# EAGLE board Qwiic AHT20 Breakout-Panel (EAGLE 9.6.2), part 1 of 3
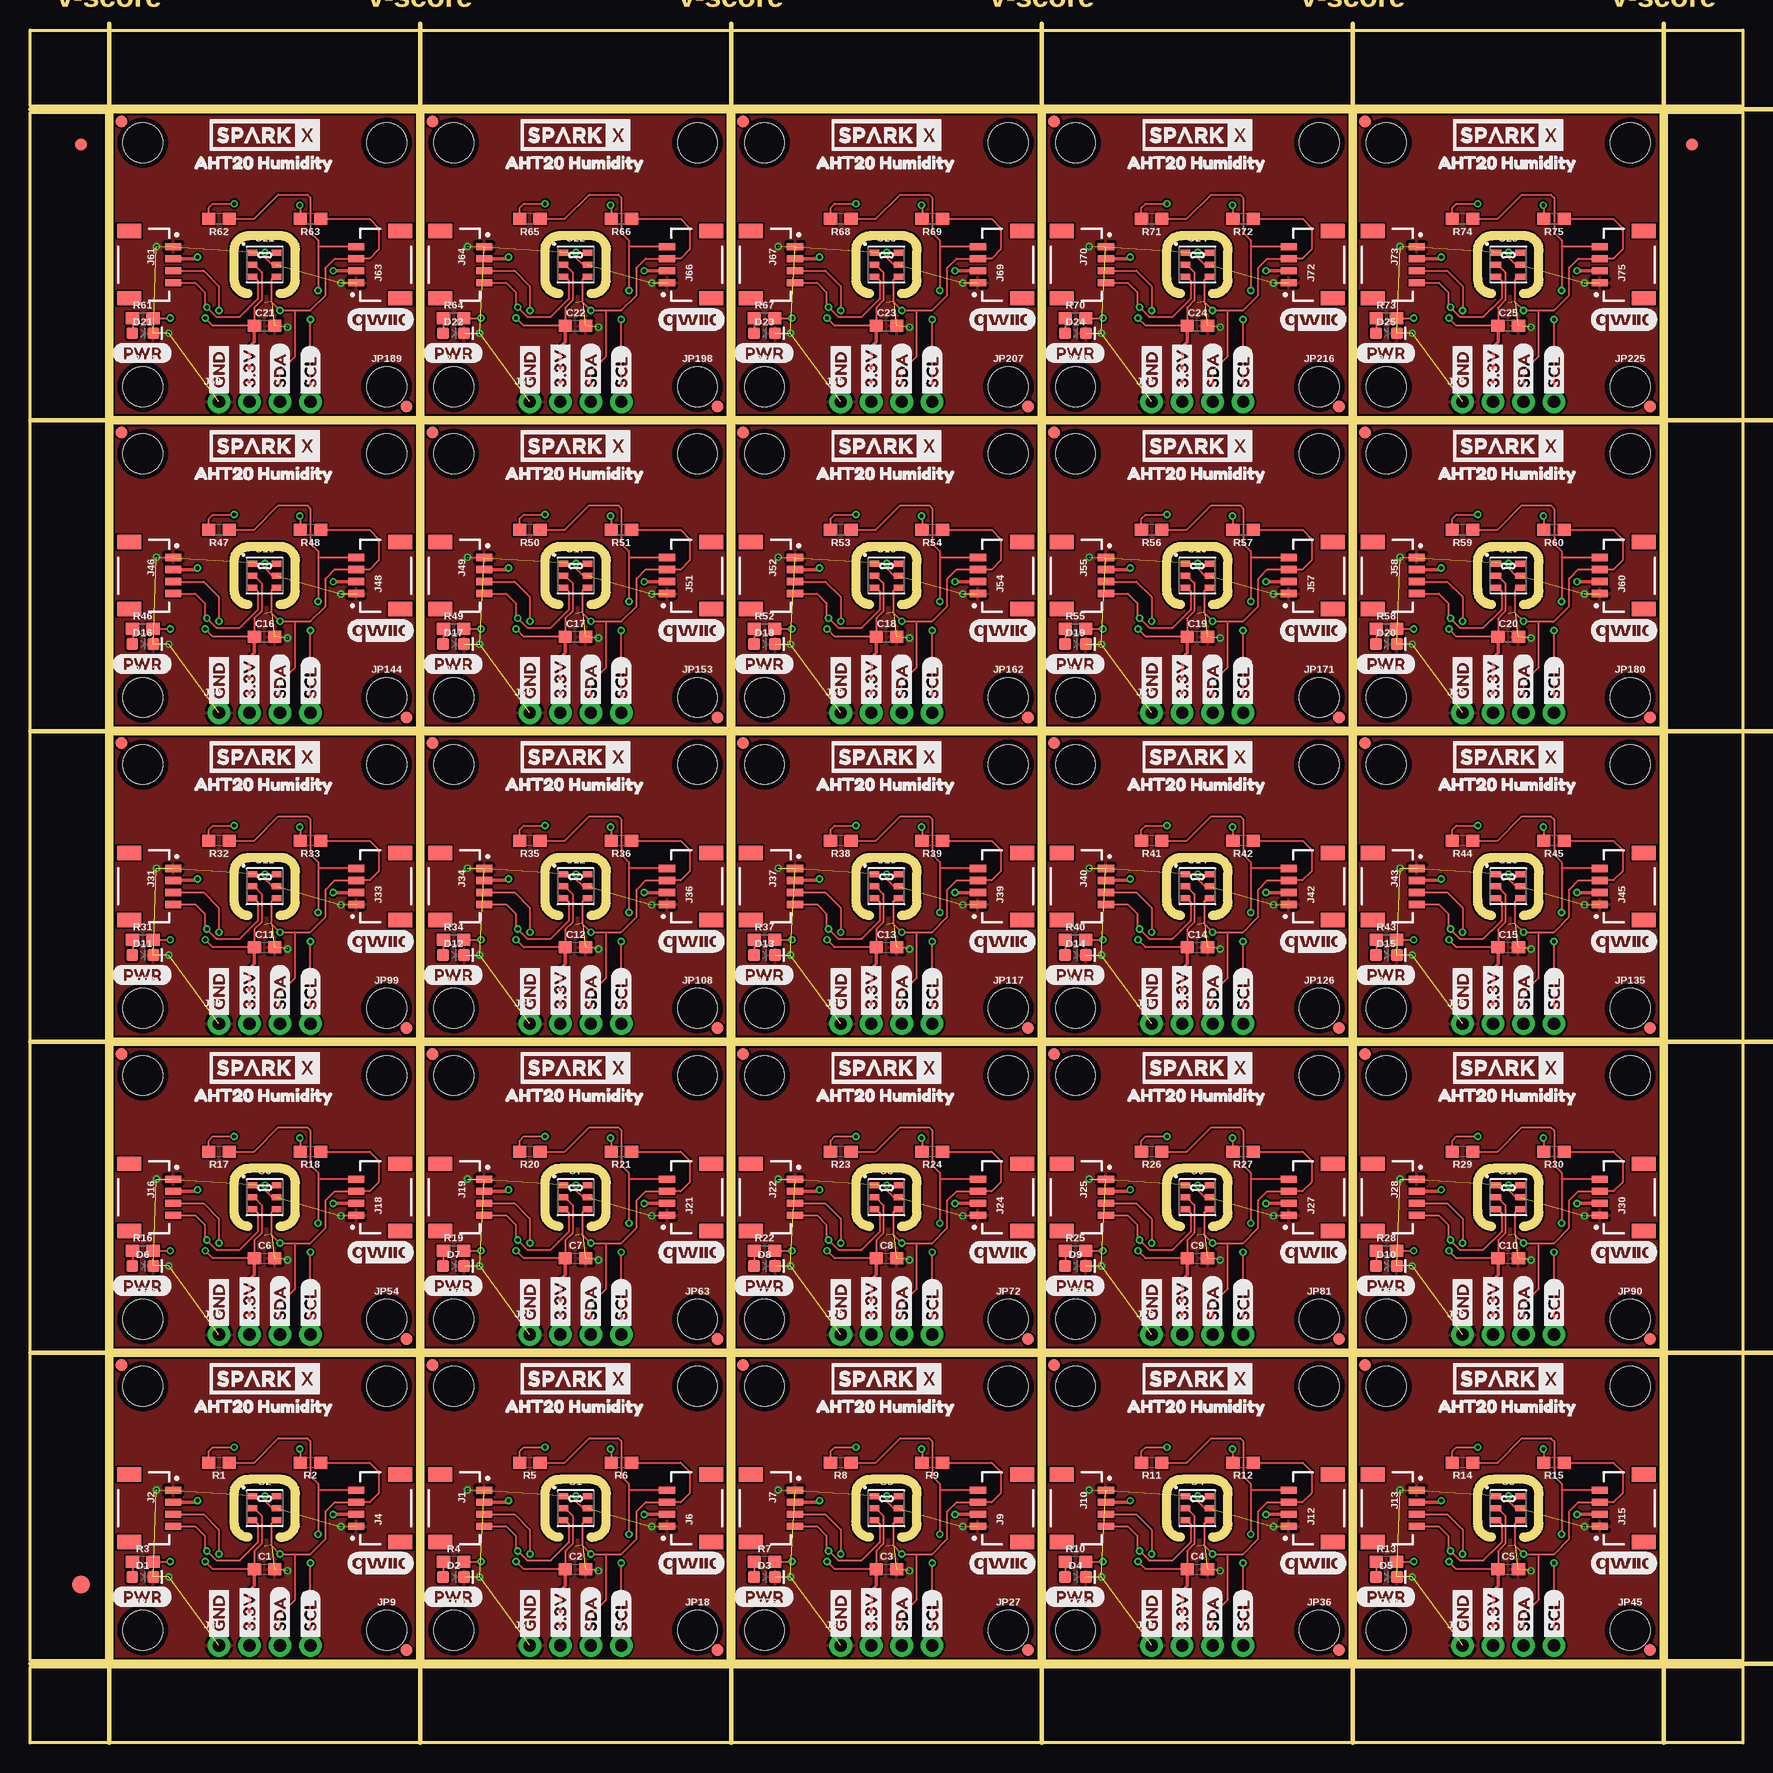
[diagram p0: board, top side]
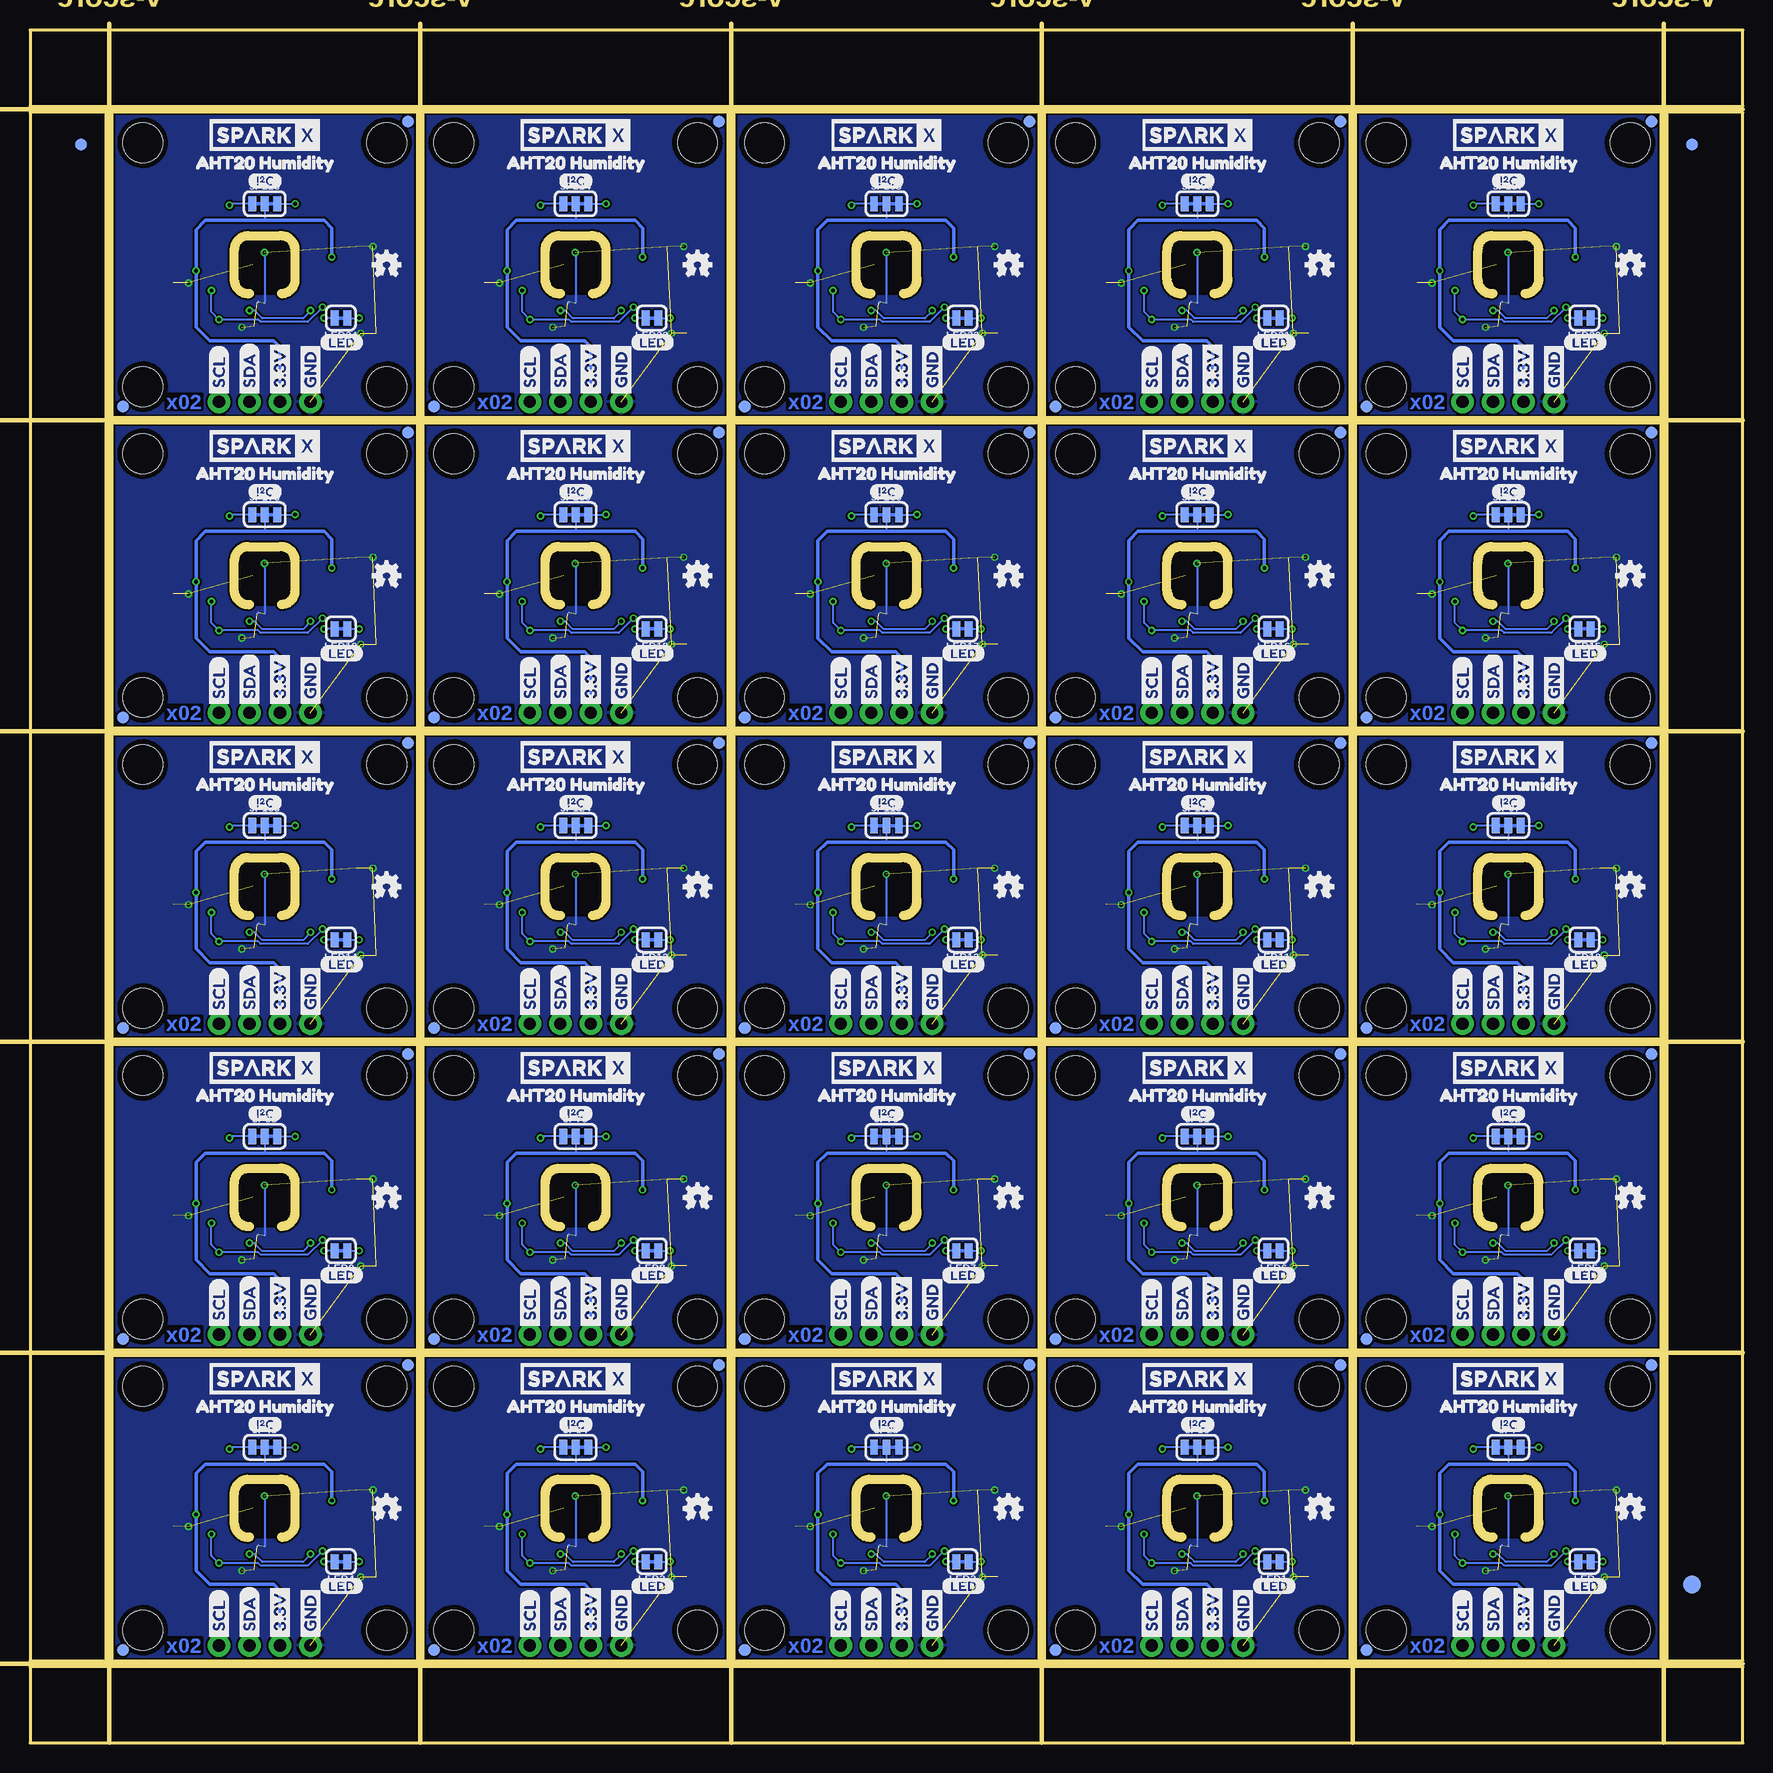
[diagram p1: board, bottom side, seen from below]

Size 142.75 x 142.75 mm. Coordinates in mm from the lower left corner, seen from the top.
Outline: 291 segments
Copper layers (1*16): Top 0.035mm / dielectric 1.5mm / Bottom 0.035mm
Design rules "Qwiic AHT20 Breakout": minimum track width 6mil, minimum drill 0.3mm, track to track 6mil, track to pad 6mil, pad to pad 6mil, via to via 6mil, smd to smd 6mil, copper to edge 6mil, drill to drill 6mil, minimum pad ring 6mil, minimum via ring 6mil, stop-mask expansion 4mil, vias tented up to drill 25mil, thermal gap 10mil
Milling: 12 lines

## Footprints (pad centres in the part's own frame; a part is rotated, then mirrored left to right if it is on the bottom)
0603 = smd 1.1 x 1: 1 -0.85,0; 2 0.85,0
LED-0603 = smd 1 x 1: A -0.877,0; C 0.877,0
FIDUCIAL-1X2 = smd 1 x 1: 1 0,0
FIDUCIAL-1.5X3 = smd 1.5 x 1.5: 1 0,0
JST04_1MM_RA = smd 0.6 x 1.35: 1 -1.5,0; 2 -0.5,0; 3 0.5,0; 4 1.5,0 | smd 1.2 x 2: NC1 2.8,-3.675; NC2 -2.8,-3.675
1X04_NO_SILK = drill 1.016 pad 1.88: 1 0,0; 2 2.54,0; 3 5.08,0; 4 7.62,0
STAND-OFF = hole 3.302: 0,0
SMT-JUMPER_3_2-NC_TRACE_SILK = smd 0.66 x 1.27: 1 -1.041,0; 2 0,0; 3 1.041,0
SMT-JUMPER_2_NC_TRACE_SILK = smd 0.66 x 1.27: 1 -0.521,0; 2 0.521,0
QFN-6 = smd 0.8 x 0.5: ADR -1,1; GND 1,0; NC2 1,1; SCL -1,-1; SDA 1,-1; VDD -1,0

## Placement (x,y rotation side)
C1  0.1uF  [0603]  19.56,14.48 0 top
C2  0.1uF  [0603]  45.47,14.48 0 top
C3  0.1uF  [0603]  71.37,14.48 0 top
C4  0.1uF  [0603]  97.28,14.48 0 top
C5  0.1uF  [0603]  123.19,14.48 0 top
C6  0.1uF  [0603]  19.56,40.39 0 top
C7  0.1uF  [0603]  45.47,40.39 0 top
C8  0.1uF  [0603]  71.37,40.39 0 top
C9  0.1uF  [0603]  97.28,40.39 0 top
C10  0.1uF  [0603]  123.19,40.39 0 top
C11  0.1uF  [0603]  19.56,66.29 0 top
C12  0.1uF  [0603]  45.47,66.29 0 top
C13  0.1uF  [0603]  71.37,66.29 0 top
C14  0.1uF  [0603]  97.28,66.29 0 top
C15  0.1uF  [0603]  123.19,66.29 0 top
C16  0.1uF  [0603]  19.56,92.2 0 top
C17  0.1uF  [0603]  45.47,92.2 0 top
C18  0.1uF  [0603]  71.37,92.2 0 top
C19  0.1uF  [0603]  97.28,92.2 0 top
C20  0.1uF  [0603]  123.19,92.2 0 top
C21  0.1uF  [0603]  19.56,118.11 0 top
C22  0.1uF  [0603]  45.47,118.11 0 top
C23  0.1uF  [0603]  71.37,118.11 0 top
C24  0.1uF  [0603]  97.28,118.11 0 top
C25  0.1uF  [0603]  123.19,118.11 0 top
D1  RED  [LED-0603]  9.4,13.84 0 top
D2  RED  [LED-0603]  35.31,13.84 0 top
D3  RED  [LED-0603]  61.21,13.84 0 top
D4  RED  [LED-0603]  87.12,13.84 0 top
D5  RED  [LED-0603]  113.03,13.84 0 top
D6  RED  [LED-0603]  9.4,39.75 0 top
D7  RED  [LED-0603]  35.31,39.75 0 top
D8  RED  [LED-0603]  61.21,39.75 0 top
D9  RED  [LED-0603]  87.12,39.75 0 top
D10  RED  [LED-0603]  113.03,39.75 0 top
D11  RED  [LED-0603]  9.4,65.66 0 top
D12  RED  [LED-0603]  35.31,65.66 0 top
D13  RED  [LED-0603]  61.21,65.66 0 top
D14  RED  [LED-0603]  87.12,65.66 0 top
D15  RED  [LED-0603]  113.03,65.66 0 top
D16  RED  [LED-0603]  9.4,91.57 0 top
D17  RED  [LED-0603]  35.31,91.57 0 top
D18  RED  [LED-0603]  61.21,91.57 0 top
D19  RED  [LED-0603]  87.12,91.57 0 top
D20  RED  [LED-0603]  113.03,91.57 0 top
D21  RED  [LED-0603]  9.4,117.48 0 top
D22  RED  [LED-0603]  35.31,117.48 0 top
D23  RED  [LED-0603]  61.21,117.48 0 top
D24  RED  [LED-0603]  87.12,117.48 0 top
D25  RED  [LED-0603]  113.03,117.48 0 top
E$1  [FIDUCIAL-1X2]  4.23,133.22 0 top
E$2  [FIDUCIAL-1X2]  4.23,133.22 0 bottom
E$3  [FIDUCIAL-1X2]  138.51,133.22 0 top
E$4  [FIDUCIAL-1X2]  138.51,133.22 0 bottom
E$5  [FIDUCIAL-1.5X3]  4.23,13.21 0 top
E$6  [FIDUCIAL-1.5X3]  4.23,13.21 0 bottom
J1  QWIIC_RIGHT_ANGLE  [JST04_1MM_RA]  37.85,19.56 270 top
J2  QWIIC_RIGHT_ANGLE  [JST04_1MM_RA]  11.94,19.56 270 top
J3  PTH  [1X04_NO_SILK]  15.75,8.13 0 top
J4  QWIIC_RIGHT_ANGLE  [JST04_1MM_RA]  27.18,19.56 90 top
J5  PTH  [1X04_NO_SILK]  41.66,8.13 0 top
J6  QWIIC_RIGHT_ANGLE  [JST04_1MM_RA]  53.09,19.56 90 top
J7  QWIIC_RIGHT_ANGLE  [JST04_1MM_RA]  63.75,19.56 270 top
J8  PTH  [1X04_NO_SILK]  67.56,8.13 0 top
J9  QWIIC_RIGHT_ANGLE  [JST04_1MM_RA]  78.99,19.56 90 top
J10  QWIIC_RIGHT_ANGLE  [JST04_1MM_RA]  89.66,19.56 270 top
J11  PTH  [1X04_NO_SILK]  93.47,8.13 0 top
J12  QWIIC_RIGHT_ANGLE  [JST04_1MM_RA]  104.9,19.56 90 top
J13  QWIIC_RIGHT_ANGLE  [JST04_1MM_RA]  115.57,19.56 270 top
J14  PTH  [1X04_NO_SILK]  119.38,8.13 0 top
J15  QWIIC_RIGHT_ANGLE  [JST04_1MM_RA]  130.81,19.56 90 top
J16  QWIIC_RIGHT_ANGLE  [JST04_1MM_RA]  11.94,45.47 270 top
J17  PTH  [1X04_NO_SILK]  15.75,34.04 0 top
J18  QWIIC_RIGHT_ANGLE  [JST04_1MM_RA]  27.18,45.47 90 top
J19  QWIIC_RIGHT_ANGLE  [JST04_1MM_RA]  37.85,45.47 270 top
J20  PTH  [1X04_NO_SILK]  41.66,34.04 0 top
J21  QWIIC_RIGHT_ANGLE  [JST04_1MM_RA]  53.09,45.47 90 top
J22  QWIIC_RIGHT_ANGLE  [JST04_1MM_RA]  63.75,45.47 270 top
J23  PTH  [1X04_NO_SILK]  67.56,34.04 0 top
J24  QWIIC_RIGHT_ANGLE  [JST04_1MM_RA]  78.99,45.47 90 top
J25  QWIIC_RIGHT_ANGLE  [JST04_1MM_RA]  89.66,45.47 270 top
J26  PTH  [1X04_NO_SILK]  93.47,34.04 0 top
J27  QWIIC_RIGHT_ANGLE  [JST04_1MM_RA]  104.9,45.47 90 top
J28  QWIIC_RIGHT_ANGLE  [JST04_1MM_RA]  115.57,45.47 270 top
J29  PTH  [1X04_NO_SILK]  119.38,34.04 0 top
J30  QWIIC_RIGHT_ANGLE  [JST04_1MM_RA]  130.81,45.47 90 top
J31  QWIIC_RIGHT_ANGLE  [JST04_1MM_RA]  11.94,71.37 270 top
J32  PTH  [1X04_NO_SILK]  15.75,59.94 0 top
J33  QWIIC_RIGHT_ANGLE  [JST04_1MM_RA]  27.18,71.37 90 top
J34  QWIIC_RIGHT_ANGLE  [JST04_1MM_RA]  37.85,71.37 270 top
J35  PTH  [1X04_NO_SILK]  41.66,59.94 0 top
J36  QWIIC_RIGHT_ANGLE  [JST04_1MM_RA]  53.09,71.37 90 top
J37  QWIIC_RIGHT_ANGLE  [JST04_1MM_RA]  63.75,71.37 270 top
J38  PTH  [1X04_NO_SILK]  67.56,59.94 0 top
J39  QWIIC_RIGHT_ANGLE  [JST04_1MM_RA]  78.99,71.37 90 top
J40  QWIIC_RIGHT_ANGLE  [JST04_1MM_RA]  89.66,71.37 270 top
J41  PTH  [1X04_NO_SILK]  93.47,59.94 0 top
J42  QWIIC_RIGHT_ANGLE  [JST04_1MM_RA]  104.9,71.37 90 top
J43  QWIIC_RIGHT_ANGLE  [JST04_1MM_RA]  115.57,71.37 270 top
J44  PTH  [1X04_NO_SILK]  119.38,59.94 0 top
J45  QWIIC_RIGHT_ANGLE  [JST04_1MM_RA]  130.81,71.37 90 top
J46  QWIIC_RIGHT_ANGLE  [JST04_1MM_RA]  11.94,97.28 270 top
J47  PTH  [1X04_NO_SILK]  15.75,85.85 0 top
J48  QWIIC_RIGHT_ANGLE  [JST04_1MM_RA]  27.18,97.28 90 top
J49  QWIIC_RIGHT_ANGLE  [JST04_1MM_RA]  37.85,97.28 270 top
J50  PTH  [1X04_NO_SILK]  41.66,85.85 0 top
J51  QWIIC_RIGHT_ANGLE  [JST04_1MM_RA]  53.09,97.28 90 top
J52  QWIIC_RIGHT_ANGLE  [JST04_1MM_RA]  63.75,97.28 270 top
J53  PTH  [1X04_NO_SILK]  67.56,85.85 0 top
J54  QWIIC_RIGHT_ANGLE  [JST04_1MM_RA]  78.99,97.28 90 top
J55  QWIIC_RIGHT_ANGLE  [JST04_1MM_RA]  89.66,97.28 270 top
J56  PTH  [1X04_NO_SILK]  93.47,85.85 0 top
J57  QWIIC_RIGHT_ANGLE  [JST04_1MM_RA]  104.9,97.28 90 top
J58  QWIIC_RIGHT_ANGLE  [JST04_1MM_RA]  115.57,97.28 270 top
J59  PTH  [1X04_NO_SILK]  119.38,85.85 0 top
J60  QWIIC_RIGHT_ANGLE  [JST04_1MM_RA]  130.81,97.28 90 top
J61  QWIIC_RIGHT_ANGLE  [JST04_1MM_RA]  11.94,123.19 270 top
J62  PTH  [1X04_NO_SILK]  15.75,111.76 0 top
J63  QWIIC_RIGHT_ANGLE  [JST04_1MM_RA]  27.18,123.19 90 top
J64  QWIIC_RIGHT_ANGLE  [JST04_1MM_RA]  37.85,123.19 270 top
J65  PTH  [1X04_NO_SILK]  41.66,111.76 0 top
J66  QWIIC_RIGHT_ANGLE  [JST04_1MM_RA]  53.09,123.19 90 top
J67  QWIIC_RIGHT_ANGLE  [JST04_1MM_RA]  63.75,123.19 270 top
J68  PTH  [1X04_NO_SILK]  67.56,111.76 0 top
J69  QWIIC_RIGHT_ANGLE  [JST04_1MM_RA]  78.99,123.19 90 top
J70  QWIIC_RIGHT_ANGLE  [JST04_1MM_RA]  89.66,123.19 270 top
J71  PTH  [1X04_NO_SILK]  93.47,111.76 0 top
J72  QWIIC_RIGHT_ANGLE  [JST04_1MM_RA]  104.9,123.19 90 top
J73  QWIIC_RIGHT_ANGLE  [JST04_1MM_RA]  115.57,123.19 270 top
J74  PTH  [1X04_NO_SILK]  119.38,111.76 0 top
J75  QWIIC_RIGHT_ANGLE  [JST04_1MM_RA]  130.81,123.19 90 top
JP1  FIDUCIAL1X2  [FIDUCIAL-1X2]  7.62,31.5 0 bottom
JP2  FIDUCIAL1X2  [FIDUCIAL-1X2]  31.37,7.75 0 top
JP3  STAND-OFF  [STAND-OFF]  9.4,29.72 0 top
JP4  STAND-OFF  [STAND-OFF]  29.72,29.72 0 top
JP5  FIDUCIAL1X2  [FIDUCIAL-1X2]  31.37,7.75 0 bottom
JP6  FIDUCIAL1X2  [FIDUCIAL-1X2]  7.62,31.5 0 top
JP7  JUMPER-SMT_3_2-NC_TRACE_SILK  [SMT-JUMPER_3_2-NC_TRACE_SILK]  19.56,24.64 0 bottom
JP8  STAND-OFF  [STAND-OFF]  9.4,9.4 0 top
JP9  STAND-OFF  [STAND-OFF]  29.72,9.4 0 top
JP10  STAND-OFF  [STAND-OFF]  35.31,29.72 0 top
JP11  STAND-OFF  [STAND-OFF]  55.63,29.72 0 top
JP12  FIDUCIAL1X2  [FIDUCIAL-1X2]  57.28,7.75 0 top
JP13  FIDUCIAL1X2  [FIDUCIAL-1X2]  33.53,31.5 0 top
JP14  FIDUCIAL1X2  [FIDUCIAL-1X2]  33.53,31.5 0 bottom
JP15  FIDUCIAL1X2  [FIDUCIAL-1X2]  57.28,7.75 0 bottom
JP16  JUMPER-SMT_3_2-NC_TRACE_SILK  [SMT-JUMPER_3_2-NC_TRACE_SILK]  45.47,24.64 0 bottom
JP17  STAND-OFF  [STAND-OFF]  35.31,9.4 0 top
JP18  STAND-OFF  [STAND-OFF]  55.63,9.4 0 top
JP19  STAND-OFF  [STAND-OFF]  61.21,29.72 0 top
JP20  STAND-OFF  [STAND-OFF]  81.53,29.72 0 top
JP21  FIDUCIAL1X2  [FIDUCIAL-1X2]  83.19,7.75 0 top
JP22  FIDUCIAL1X2  [FIDUCIAL-1X2]  59.44,31.5 0 top
JP23  FIDUCIAL1X2  [FIDUCIAL-1X2]  59.44,31.5 0 bottom
JP24  FIDUCIAL1X2  [FIDUCIAL-1X2]  83.19,7.75 0 bottom
JP25  JUMPER-SMT_3_2-NC_TRACE_SILK  [SMT-JUMPER_3_2-NC_TRACE_SILK]  71.37,24.64 0 bottom
JP26  STAND-OFF  [STAND-OFF]  61.21,9.4 0 top
JP27  STAND-OFF  [STAND-OFF]  81.53,9.4 0 top
JP28  STAND-OFF  [STAND-OFF]  87.12,29.72 0 top
JP29  STAND-OFF  [STAND-OFF]  107.44,29.72 0 top
JP30  FIDUCIAL1X2  [FIDUCIAL-1X2]  109.09,7.75 0 top
JP31  FIDUCIAL1X2  [FIDUCIAL-1X2]  85.34,31.5 0 top
JP32  FIDUCIAL1X2  [FIDUCIAL-1X2]  85.34,31.5 0 bottom
JP33  FIDUCIAL1X2  [FIDUCIAL-1X2]  109.09,7.75 0 bottom
JP34  JUMPER-SMT_3_2-NC_TRACE_SILK  [SMT-JUMPER_3_2-NC_TRACE_SILK]  97.28,24.64 0 bottom
JP35  STAND-OFF  [STAND-OFF]  87.12,9.4 0 top
JP36  STAND-OFF  [STAND-OFF]  107.44,9.4 0 top
JP37  STAND-OFF  [STAND-OFF]  113.03,29.72 0 top
JP38  STAND-OFF  [STAND-OFF]  133.35,29.72 0 top
JP39  FIDUCIAL1X2  [FIDUCIAL-1X2]  135,7.75 0 top
JP40  FIDUCIAL1X2  [FIDUCIAL-1X2]  111.25,31.5 0 top
JP41  FIDUCIAL1X2  [FIDUCIAL-1X2]  111.25,31.5 0 bottom
JP42  FIDUCIAL1X2  [FIDUCIAL-1X2]  135,7.75 0 bottom
JP43  JUMPER-SMT_3_2-NC_TRACE_SILK  [SMT-JUMPER_3_2-NC_TRACE_SILK]  123.19,24.64 0 bottom
JP44  STAND-OFF  [STAND-OFF]  113.03,9.4 0 top
JP45  STAND-OFF  [STAND-OFF]  133.35,9.4 0 top
JP46  STAND-OFF  [STAND-OFF]  9.4,55.63 0 top
JP47  STAND-OFF  [STAND-OFF]  29.72,55.63 0 top
JP48  FIDUCIAL1X2  [FIDUCIAL-1X2]  31.37,33.66 0 top
JP49  FIDUCIAL1X2  [FIDUCIAL-1X2]  7.62,57.4 0 top
JP50  FIDUCIAL1X2  [FIDUCIAL-1X2]  7.62,57.4 0 bottom
JP51  FIDUCIAL1X2  [FIDUCIAL-1X2]  31.37,33.66 0 bottom
JP52  JUMPER-SMT_3_2-NC_TRACE_SILK  [SMT-JUMPER_3_2-NC_TRACE_SILK]  19.56,50.55 0 bottom
JP53  STAND-OFF  [STAND-OFF]  9.4,35.31 0 top
JP54  STAND-OFF  [STAND-OFF]  29.72,35.31 0 top
JP55  STAND-OFF  [STAND-OFF]  35.31,55.63 0 top
JP56  STAND-OFF  [STAND-OFF]  55.63,55.63 0 top
JP57  FIDUCIAL1X2  [FIDUCIAL-1X2]  57.28,33.66 0 top
JP58  FIDUCIAL1X2  [FIDUCIAL-1X2]  33.53,57.4 0 top
JP59  FIDUCIAL1X2  [FIDUCIAL-1X2]  33.53,57.4 0 bottom
JP60  FIDUCIAL1X2  [FIDUCIAL-1X2]  57.28,33.66 0 bottom
JP61  JUMPER-SMT_3_2-NC_TRACE_SILK  [SMT-JUMPER_3_2-NC_TRACE_SILK]  45.47,50.55 0 bottom
JP62  STAND-OFF  [STAND-OFF]  35.31,35.31 0 top
JP63  STAND-OFF  [STAND-OFF]  55.63,35.31 0 top
JP64  STAND-OFF  [STAND-OFF]  61.21,55.63 0 top
JP65  STAND-OFF  [STAND-OFF]  81.53,55.63 0 top
JP66  FIDUCIAL1X2  [FIDUCIAL-1X2]  83.19,33.66 0 top
JP67  FIDUCIAL1X2  [FIDUCIAL-1X2]  59.44,57.4 0 top
JP68  FIDUCIAL1X2  [FIDUCIAL-1X2]  59.44,57.4 0 bottom
JP69  FIDUCIAL1X2  [FIDUCIAL-1X2]  83.19,33.66 0 bottom
JP70  JUMPER-SMT_3_2-NC_TRACE_SILK  [SMT-JUMPER_3_2-NC_TRACE_SILK]  71.37,50.55 0 bottom
JP71  STAND-OFF  [STAND-OFF]  61.21,35.31 0 top
JP72  STAND-OFF  [STAND-OFF]  81.53,35.31 0 top
JP73  STAND-OFF  [STAND-OFF]  87.12,55.63 0 top
JP74  STAND-OFF  [STAND-OFF]  107.44,55.63 0 top
JP75  FIDUCIAL1X2  [FIDUCIAL-1X2]  109.09,33.66 0 top
JP76  FIDUCIAL1X2  [FIDUCIAL-1X2]  85.34,57.4 0 top
JP77  FIDUCIAL1X2  [FIDUCIAL-1X2]  85.34,57.4 0 bottom
JP78  FIDUCIAL1X2  [FIDUCIAL-1X2]  109.09,33.66 0 bottom
JP79  JUMPER-SMT_3_2-NC_TRACE_SILK  [SMT-JUMPER_3_2-NC_TRACE_SILK]  97.28,50.55 0 bottom
JP80  STAND-OFF  [STAND-OFF]  87.12,35.31 0 top
JP81  STAND-OFF  [STAND-OFF]  107.44,35.31 0 top
JP82  STAND-OFF  [STAND-OFF]  113.03,55.63 0 top
JP83  STAND-OFF  [STAND-OFF]  133.35,55.63 0 top
JP84  FIDUCIAL1X2  [FIDUCIAL-1X2]  135,33.66 0 top
JP85  FIDUCIAL1X2  [FIDUCIAL-1X2]  111.25,57.4 0 top
JP86  FIDUCIAL1X2  [FIDUCIAL-1X2]  111.25,57.4 0 bottom
JP87  FIDUCIAL1X2  [FIDUCIAL-1X2]  135,33.66 0 bottom
JP88  JUMPER-SMT_3_2-NC_TRACE_SILK  [SMT-JUMPER_3_2-NC_TRACE_SILK]  123.19,50.55 0 bottom
JP89  STAND-OFF  [STAND-OFF]  113.03,35.31 0 top
JP90  STAND-OFF  [STAND-OFF]  133.35,35.31 0 top
JP91  STAND-OFF  [STAND-OFF]  9.4,81.53 0 top
JP92  STAND-OFF  [STAND-OFF]  29.72,81.53 0 top
JP93  FIDUCIAL1X2  [FIDUCIAL-1X2]  31.37,59.56 0 top
JP94  FIDUCIAL1X2  [FIDUCIAL-1X2]  7.62,83.31 0 top
JP95  FIDUCIAL1X2  [FIDUCIAL-1X2]  7.62,83.31 0 bottom
JP96  FIDUCIAL1X2  [FIDUCIAL-1X2]  31.37,59.56 0 bottom
JP97  JUMPER-SMT_3_2-NC_TRACE_SILK  [SMT-JUMPER_3_2-NC_TRACE_SILK]  19.56,76.45 0 bottom
JP98  STAND-OFF  [STAND-OFF]  9.4,61.21 0 top
JP99  STAND-OFF  [STAND-OFF]  29.72,61.21 0 top
JP100  STAND-OFF  [STAND-OFF]  35.31,81.53 0 top
JP101  STAND-OFF  [STAND-OFF]  55.63,81.53 0 top
JP102  FIDUCIAL1X2  [FIDUCIAL-1X2]  57.28,59.56 0 top
JP103  FIDUCIAL1X2  [FIDUCIAL-1X2]  33.53,83.31 0 top
JP104  FIDUCIAL1X2  [FIDUCIAL-1X2]  33.53,83.31 0 bottom
JP105  FIDUCIAL1X2  [FIDUCIAL-1X2]  57.28,59.56 0 bottom
JP106  JUMPER-SMT_3_2-NC_TRACE_SILK  [SMT-JUMPER_3_2-NC_TRACE_SILK]  45.47,76.45 0 bottom
JP107  STAND-OFF  [STAND-OFF]  35.31,61.21 0 top
JP108  STAND-OFF  [STAND-OFF]  55.63,61.21 0 top
JP109  STAND-OFF  [STAND-OFF]  61.21,81.53 0 top
JP110  STAND-OFF  [STAND-OFF]  81.53,81.53 0 top
JP111  FIDUCIAL1X2  [FIDUCIAL-1X2]  83.19,59.56 0 top
JP112  FIDUCIAL1X2  [FIDUCIAL-1X2]  59.44,83.31 0 top
JP113  FIDUCIAL1X2  [FIDUCIAL-1X2]  59.44,83.31 0 bottom
JP114  FIDUCIAL1X2  [FIDUCIAL-1X2]  83.19,59.56 0 bottom
JP115  JUMPER-SMT_3_2-NC_TRACE_SILK  [SMT-JUMPER_3_2-NC_TRACE_SILK]  71.37,76.45 0 bottom
JP116  STAND-OFF  [STAND-OFF]  61.21,61.21 0 top
JP117  STAND-OFF  [STAND-OFF]  81.53,61.21 0 top
JP118  STAND-OFF  [STAND-OFF]  87.12,81.53 0 top
JP119  STAND-OFF  [STAND-OFF]  107.44,81.53 0 top
JP120  FIDUCIAL1X2  [FIDUCIAL-1X2]  109.09,59.56 0 top
JP121  FIDUCIAL1X2  [FIDUCIAL-1X2]  85.34,83.31 0 top
JP122  FIDUCIAL1X2  [FIDUCIAL-1X2]  85.34,83.31 0 bottom
JP123  FIDUCIAL1X2  [FIDUCIAL-1X2]  109.09,59.56 0 bottom
JP124  JUMPER-SMT_3_2-NC_TRACE_SILK  [SMT-JUMPER_3_2-NC_TRACE_SILK]  97.28,76.45 0 bottom
JP125  STAND-OFF  [STAND-OFF]  87.12,61.21 0 top
JP126  STAND-OFF  [STAND-OFF]  107.44,61.21 0 top
JP127  STAND-OFF  [STAND-OFF]  113.03,81.53 0 top
JP128  STAND-OFF  [STAND-OFF]  133.35,81.53 0 top
JP129  FIDUCIAL1X2  [FIDUCIAL-1X2]  135,59.56 0 top
JP130  FIDUCIAL1X2  [FIDUCIAL-1X2]  111.25,83.31 0 top
JP131  FIDUCIAL1X2  [FIDUCIAL-1X2]  111.25,83.31 0 bottom
JP132  FIDUCIAL1X2  [FIDUCIAL-1X2]  135,59.56 0 bottom
JP133  JUMPER-SMT_3_2-NC_TRACE_SILK  [SMT-JUMPER_3_2-NC_TRACE_SILK]  123.19,76.45 0 bottom
JP134  STAND-OFF  [STAND-OFF]  113.03,61.21 0 top
JP135  STAND-OFF  [STAND-OFF]  133.35,61.21 0 top
JP136  STAND-OFF  [STAND-OFF]  9.4,107.44 0 top
JP137  STAND-OFF  [STAND-OFF]  29.72,107.44 0 top
JP138  FIDUCIAL1X2  [FIDUCIAL-1X2]  31.37,85.47 0 top
JP139  FIDUCIAL1X2  [FIDUCIAL-1X2]  7.62,109.22 0 top
JP140  FIDUCIAL1X2  [FIDUCIAL-1X2]  7.62,109.22 0 bottom
JP141  FIDUCIAL1X2  [FIDUCIAL-1X2]  31.37,85.47 0 bottom
JP142  JUMPER-SMT_3_2-NC_TRACE_SILK  [SMT-JUMPER_3_2-NC_TRACE_SILK]  19.56,102.36 0 bottom
JP143  STAND-OFF  [STAND-OFF]  9.4,87.12 0 top
JP144  STAND-OFF  [STAND-OFF]  29.72,87.12 0 top
JP145  STAND-OFF  [STAND-OFF]  35.31,107.44 0 top
JP146  STAND-OFF  [STAND-OFF]  55.63,107.44 0 top
JP147  FIDUCIAL1X2  [FIDUCIAL-1X2]  57.28,85.47 0 top
JP148  FIDUCIAL1X2  [FIDUCIAL-1X2]  33.53,109.22 0 top
JP149  FIDUCIAL1X2  [FIDUCIAL-1X2]  33.53,109.22 0 bottom
JP150  FIDUCIAL1X2  [FIDUCIAL-1X2]  57.28,85.47 0 bottom
JP151  JUMPER-SMT_3_2-NC_TRACE_SILK  [SMT-JUMPER_3_2-NC_TRACE_SILK]  45.47,102.36 0 bottom
JP152  STAND-OFF  [STAND-OFF]  35.31,87.12 0 top
JP153  STAND-OFF  [STAND-OFF]  55.63,87.12 0 top
JP154  STAND-OFF  [STAND-OFF]  61.21,107.44 0 top
JP155  STAND-OFF  [STAND-OFF]  81.53,107.44 0 top
JP156  FIDUCIAL1X2  [FIDUCIAL-1X2]  83.19,85.47 0 top
JP157  FIDUCIAL1X2  [FIDUCIAL-1X2]  59.44,109.22 0 top
JP158  FIDUCIAL1X2  [FIDUCIAL-1X2]  59.44,109.22 0 bottom
JP159  FIDUCIAL1X2  [FIDUCIAL-1X2]  83.19,85.47 0 bottom
JP160  JUMPER-SMT_3_2-NC_TRACE_SILK  [SMT-JUMPER_3_2-NC_TRACE_SILK]  71.37,102.36 0 bottom
JP161  STAND-OFF  [STAND-OFF]  61.21,87.12 0 top
JP162  STAND-OFF  [STAND-OFF]  81.53,87.12 0 top
JP163  STAND-OFF  [STAND-OFF]  87.12,107.44 0 top
JP164  STAND-OFF  [STAND-OFF]  107.44,107.44 0 top
JP165  FIDUCIAL1X2  [FIDUCIAL-1X2]  109.09,85.47 0 top
JP166  FIDUCIAL1X2  [FIDUCIAL-1X2]  85.34,109.22 0 top
JP167  FIDUCIAL1X2  [FIDUCIAL-1X2]  85.34,109.22 0 bottom
JP168  FIDUCIAL1X2  [FIDUCIAL-1X2]  109.09,85.47 0 bottom
JP169  JUMPER-SMT_3_2-NC_TRACE_SILK  [SMT-JUMPER_3_2-NC_TRACE_SILK]  97.28,102.36 0 bottom
JP170  STAND-OFF  [STAND-OFF]  87.12,87.12 0 top
JP171  STAND-OFF  [STAND-OFF]  107.44,87.12 0 top
JP172  STAND-OFF  [STAND-OFF]  113.03,107.44 0 top
JP173  STAND-OFF  [STAND-OFF]  133.35,107.44 0 top
JP174  FIDUCIAL1X2  [FIDUCIAL-1X2]  135,85.47 0 top
JP175  FIDUCIAL1X2  [FIDUCIAL-1X2]  111.25,109.22 0 top
JP176  FIDUCIAL1X2  [FIDUCIAL-1X2]  111.25,109.22 0 bottom
JP177  FIDUCIAL1X2  [FIDUCIAL-1X2]  135,85.47 0 bottom
JP178  JUMPER-SMT_3_2-NC_TRACE_SILK  [SMT-JUMPER_3_2-NC_TRACE_SILK]  123.19,102.36 0 bottom
JP179  STAND-OFF  [STAND-OFF]  113.03,87.12 0 top
JP180  STAND-OFF  [STAND-OFF]  133.35,87.12 0 top
JP181  STAND-OFF  [STAND-OFF]  9.4,133.35 0 top
JP182  STAND-OFF  [STAND-OFF]  29.72,133.35 0 top
JP183  FIDUCIAL1X2  [FIDUCIAL-1X2]  31.37,111.38 0 top
JP184  FIDUCIAL1X2  [FIDUCIAL-1X2]  7.62,135.13 0 top
JP185  FIDUCIAL1X2  [FIDUCIAL-1X2]  7.62,135.13 0 bottom
JP186  FIDUCIAL1X2  [FIDUCIAL-1X2]  31.37,111.38 0 bottom
JP187  JUMPER-SMT_3_2-NC_TRACE_SILK  [SMT-JUMPER_3_2-NC_TRACE_SILK]  19.56,128.27 0 bottom
JP188  STAND-OFF  [STAND-OFF]  9.4,113.03 0 top
JP189  STAND-OFF  [STAND-OFF]  29.72,113.03 0 top
JP190  STAND-OFF  [STAND-OFF]  35.31,133.35 0 top
JP191  STAND-OFF  [STAND-OFF]  55.63,133.35 0 top
JP192  FIDUCIAL1X2  [FIDUCIAL-1X2]  57.28,111.38 0 top
JP193  FIDUCIAL1X2  [FIDUCIAL-1X2]  33.53,135.13 0 top
JP194  FIDUCIAL1X2  [FIDUCIAL-1X2]  33.53,135.13 0 bottom
JP195  FIDUCIAL1X2  [FIDUCIAL-1X2]  57.28,111.38 0 bottom
JP196  JUMPER-SMT_3_2-NC_TRACE_SILK  [SMT-JUMPER_3_2-NC_TRACE_SILK]  45.47,128.27 0 bottom
JP197  STAND-OFF  [STAND-OFF]  35.31,113.03 0 top
JP198  STAND-OFF  [STAND-OFF]  55.63,113.03 0 top
JP199  STAND-OFF  [STAND-OFF]  61.21,133.35 0 top
JP200  STAND-OFF  [STAND-OFF]  81.53,133.35 0 top
JP201  FIDUCIAL1X2  [FIDUCIAL-1X2]  83.19,111.38 0 top
JP202  FIDUCIAL1X2  [FIDUCIAL-1X2]  59.44,135.13 0 top
JP203  FIDUCIAL1X2  [FIDUCIAL-1X2]  59.44,135.13 0 bottom
JP204  FIDUCIAL1X2  [FIDUCIAL-1X2]  83.19,111.38 0 bottom
JP205  JUMPER-SMT_3_2-NC_TRACE_SILK  [SMT-JUMPER_3_2-NC_TRACE_SILK]  71.37,128.27 0 bottom
JP206  STAND-OFF  [STAND-OFF]  61.21,113.03 0 top
JP207  STAND-OFF  [STAND-OFF]  81.53,113.03 0 top
JP208  STAND-OFF  [STAND-OFF]  87.12,133.35 0 top
JP209  STAND-OFF  [STAND-OFF]  107.44,133.35 0 top
JP210  FIDUCIAL1X2  [FIDUCIAL-1X2]  109.09,111.38 0 top
JP211  FIDUCIAL1X2  [FIDUCIAL-1X2]  85.34,135.13 0 top
JP212  FIDUCIAL1X2  [FIDUCIAL-1X2]  85.34,135.13 0 bottom
JP213  FIDUCIAL1X2  [FIDUCIAL-1X2]  109.09,111.38 0 bottom
JP214  JUMPER-SMT_3_2-NC_TRACE_SILK  [SMT-JUMPER_3_2-NC_TRACE_SILK]  97.28,128.27 0 bottom
JP215  STAND-OFF  [STAND-OFF]  87.12,113.03 0 top
JP216  STAND-OFF  [STAND-OFF]  107.44,113.03 0 top
JP217  STAND-OFF  [STAND-OFF]  113.03,133.35 0 top
JP218  STAND-OFF  [STAND-OFF]  133.35,133.35 0 top
JP219  FIDUCIAL1X2  [FIDUCIAL-1X2]  135,111.38 0 top
JP220  FIDUCIAL1X2  [FIDUCIAL-1X2]  111.25,135.13 0 top
JP221  FIDUCIAL1X2  [FIDUCIAL-1X2]  111.25,135.13 0 bottom
JP222  FIDUCIAL1X2  [FIDUCIAL-1X2]  135,111.38 0 bottom
JP223  JUMPER-SMT_3_2-NC_TRACE_SILK  [SMT-JUMPER_3_2-NC_TRACE_SILK]  123.19,128.27 0 bottom
JP224  STAND-OFF  [STAND-OFF]  113.03,113.03 0 top
JP225  STAND-OFF  [STAND-OFF]  133.35,113.03 0 top
LED  JUMPER-SMT_2_NC_TRACE_SILK  [SMT-JUMPER_2_NC_TRACE_SILK]  13.21,15.11 180 bottom
LED1  JUMPER-SMT_2_NC_TRACE_SILK  [SMT-JUMPER_2_NC_TRACE_SILK]  39.12,15.11 180 bottom
LED2  JUMPER-SMT_2_NC_TRACE_SILK  [SMT-JUMPER_2_NC_TRACE_SILK]  65.02,15.11 180 bottom
LED3  JUMPER-SMT_2_NC_TRACE_SILK  [SMT-JUMPER_2_NC_TRACE_SILK]  90.93,15.11 180 bottom
LED4  JUMPER-SMT_2_NC_TRACE_SILK  [SMT-JUMPER_2_NC_TRACE_SILK]  116.84,15.11 180 bottom
LED5  JUMPER-SMT_2_NC_TRACE_SILK  [SMT-JUMPER_2_NC_TRACE_SILK]  13.21,41.02 180 bottom
LED6  JUMPER-SMT_2_NC_TRACE_SILK  [SMT-JUMPER_2_NC_TRACE_SILK]  39.12,41.02 180 bottom
LED7  JUMPER-SMT_2_NC_TRACE_SILK  [SMT-JUMPER_2_NC_TRACE_SILK]  65.02,41.02 180 bottom
LED8  JUMPER-SMT_2_NC_TRACE_SILK  [SMT-JUMPER_2_NC_TRACE_SILK]  90.93,41.02 180 bottom
LED9  JUMPER-SMT_2_NC_TRACE_SILK  [SMT-JUMPER_2_NC_TRACE_SILK]  116.84,41.02 180 bottom
LED10  JUMPER-SMT_2_NC_TRACE_SILK  [SMT-JUMPER_2_NC_TRACE_SILK]  13.21,66.93 180 bottom
LED11  JUMPER-SMT_2_NC_TRACE_SILK  [SMT-JUMPER_2_NC_TRACE_SILK]  39.12,66.93 180 bottom
LED12  JUMPER-SMT_2_NC_TRACE_SILK  [SMT-JUMPER_2_NC_TRACE_SILK]  65.02,66.93 180 bottom
LED13  JUMPER-SMT_2_NC_TRACE_SILK  [SMT-JUMPER_2_NC_TRACE_SILK]  90.93,66.93 180 bottom
LED14  JUMPER-SMT_2_NC_TRACE_SILK  [SMT-JUMPER_2_NC_TRACE_SILK]  116.84,66.93 180 bottom
LED15  JUMPER-SMT_2_NC_TRACE_SILK  [SMT-JUMPER_2_NC_TRACE_SILK]  13.21,92.84 180 bottom
LED16  JUMPER-SMT_2_NC_TRACE_SILK  [SMT-JUMPER_2_NC_TRACE_SILK]  39.12,92.84 180 bottom
LED17  JUMPER-SMT_2_NC_TRACE_SILK  [SMT-JUMPER_2_NC_TRACE_SILK]  65.02,92.84 180 bottom
LED18  JUMPER-SMT_2_NC_TRACE_SILK  [SMT-JUMPER_2_NC_TRACE_SILK]  90.93,92.84 180 bottom
LED19  JUMPER-SMT_2_NC_TRACE_SILK  [SMT-JUMPER_2_NC_TRACE_SILK]  116.84,92.84 180 bottom
LED20  JUMPER-SMT_2_NC_TRACE_SILK  [SMT-JUMPER_2_NC_TRACE_SILK]  13.21,118.75 180 bottom
LED21  JUMPER-SMT_2_NC_TRACE_SILK  [SMT-JUMPER_2_NC_TRACE_SILK]  39.12,118.75 180 bottom
LED22  JUMPER-SMT_2_NC_TRACE_SILK  [SMT-JUMPER_2_NC_TRACE_SILK]  65.02,118.75 180 bottom
LED23  JUMPER-SMT_2_NC_TRACE_SILK  [SMT-JUMPER_2_NC_TRACE_SILK]  90.93,118.75 180 bottom
LED24  JUMPER-SMT_2_NC_TRACE_SILK  [SMT-JUMPER_2_NC_TRACE_SILK]  116.84,118.75 180 bottom
LOGO1  OSHW-LOGOMINI  [OSHW-LOGO-MINI]  9.4,19.56 0 bottom
LOGO2  OSHW-LOGOMINI  [OSHW-LOGO-MINI]  35.31,19.56 0 bottom
LOGO3  OSHW-LOGOMINI  [OSHW-LOGO-MINI]  61.21,19.56 0 bottom
LOGO4  OSHW-LOGOMINI  [OSHW-LOGO-MINI]  87.12,19.56 0 bottom
LOGO5  OSHW-LOGOMINI  [OSHW-LOGO-MINI]  113.03,19.56 0 bottom
LOGO6  OSHW-LOGOMINI  [OSHW-LOGO-MINI]  9.4,45.47 0 bottom
LOGO7  OSHW-LOGOMINI  [OSHW-LOGO-MINI]  35.31,45.47 0 bottom
LOGO8  OSHW-LOGOMINI  [OSHW-LOGO-MINI]  61.21,45.47 0 bottom
LOGO9  OSHW-LOGOMINI  [OSHW-LOGO-MINI]  87.12,45.47 0 bottom
LOGO10  OSHW-LOGOMINI  [OSHW-LOGO-MINI]  113.03,45.47 0 bottom
LOGO11  OSHW-LOGOMINI  [OSHW-LOGO-MINI]  9.4,71.37 0 bottom
LOGO12  OSHW-LOGOMINI  [OSHW-LOGO-MINI]  35.31,71.37 0 bottom
LOGO13  OSHW-LOGOMINI  [OSHW-LOGO-MINI]  61.21,71.37 0 bottom
LOGO14  OSHW-LOGOMINI  [OSHW-LOGO-MINI]  87.12,71.37 0 bottom
LOGO15  OSHW-LOGOMINI  [OSHW-LOGO-MINI]  113.03,71.37 0 bottom
LOGO16  OSHW-LOGOMINI  [OSHW-LOGO-MINI]  9.4,97.28 0 bottom
LOGO17  OSHW-LOGOMINI  [OSHW-LOGO-MINI]  35.31,97.28 0 bottom
LOGO18  OSHW-LOGOMINI  [OSHW-LOGO-MINI]  61.21,97.28 0 bottom
LOGO19  OSHW-LOGOMINI  [OSHW-LOGO-MINI]  87.12,97.28 0 bottom
LOGO20  OSHW-LOGOMINI  [OSHW-LOGO-MINI]  113.03,97.28 0 bottom
LOGO21  OSHW-LOGOMINI  [OSHW-LOGO-MINI]  9.4,123.19 0 bottom
LOGO22  OSHW-LOGOMINI  [OSHW-LOGO-MINI]  35.31,123.19 0 bottom
LOGO23  OSHW-LOGOMINI  [OSHW-LOGO-MINI]  61.21,123.19 0 bottom
LOGO24  OSHW-LOGOMINI  [OSHW-LOGO-MINI]  87.12,123.19 0 bottom
LOGO25  OSHW-LOGOMINI  [OSHW-LOGO-MINI]  113.03,123.19 0 bottom
R1  2.2k  [0603]  15.75,23.37 180 top
R2  2.2k  [0603]  23.37,23.37 180 top
R3  1k  [0603]  9.4,15.11 0 top
R4  1k  [0603]  35.31,15.11 0 top
R5  2.2k  [0603]  41.66,23.37 180 top
R6  2.2k  [0603]  49.28,23.37 180 top
R7  1k  [0603]  61.21,15.11 0 top
R8  2.2k  [0603]  67.56,23.37 180 top
R9  2.2k  [0603]  75.18,23.37 180 top
R10  1k  [0603]  87.12,15.11 0 top
R11  2.2k  [0603]  93.47,23.37 180 top
R12  2.2k  [0603]  101.09,23.37 180 top
R13  1k  [0603]  113.03,15.11 0 top
R14  2.2k  [0603]  119.38,23.37 180 top
R15  2.2k  [0603]  127,23.37 180 top
R16  1k  [0603]  9.4,41.02 0 top
R17  2.2k  [0603]  15.75,49.28 180 top
R18  2.2k  [0603]  23.37,49.28 180 top
R19  1k  [0603]  35.31,41.02 0 top
R20  2.2k  [0603]  41.66,49.28 180 top
R21  2.2k  [0603]  49.28,49.28 180 top
R22  1k  [0603]  61.21,41.02 0 top
R23  2.2k  [0603]  67.56,49.28 180 top
R24  2.2k  [0603]  75.18,49.28 180 top
R25  1k  [0603]  87.12,41.02 0 top
R26  2.2k  [0603]  93.47,49.28 180 top
R27  2.2k  [0603]  101.09,49.28 180 top
R28  1k  [0603]  113.03,41.02 0 top
R29  2.2k  [0603]  119.38,49.28 180 top
R30  2.2k  [0603]  127,49.28 180 top
R31  1k  [0603]  9.4,66.93 0 top
R32  2.2k  [0603]  15.75,75.18 180 top
R33  2.2k  [0603]  23.37,75.18 180 top
R34  1k  [0603]  35.31,66.93 0 top
R35  2.2k  [0603]  41.66,75.18 180 top
R36  2.2k  [0603]  49.28,75.18 180 top
R37  1k  [0603]  61.21,66.93 0 top
R38  2.2k  [0603]  67.56,75.18 180 top
R39  2.2k  [0603]  75.18,75.18 180 top
R40  1k  [0603]  87.12,66.93 0 top
R41  2.2k  [0603]  93.47,75.18 180 top
R42  2.2k  [0603]  101.09,75.18 180 top
R43  1k  [0603]  113.03,66.93 0 top
R44  2.2k  [0603]  119.38,75.18 180 top
R45  2.2k  [0603]  127,75.18 180 top
R46  1k  [0603]  9.4,92.84 0 top
R47  2.2k  [0603]  15.75,101.09 180 top
R48  2.2k  [0603]  23.37,101.09 180 top
R49  1k  [0603]  35.31,92.84 0 top
R50  2.2k  [0603]  41.66,101.09 180 top
R51  2.2k  [0603]  49.28,101.09 180 top
R52  1k  [0603]  61.21,92.84 0 top
R53  2.2k  [0603]  67.56,101.09 180 top
R54  2.2k  [0603]  75.18,101.09 180 top
R55  1k  [0603]  87.12,92.84 0 top
R56  2.2k  [0603]  93.47,101.09 180 top
R57  2.2k  [0603]  101.09,101.09 180 top
R58  1k  [0603]  113.03,92.84 0 top
R59  2.2k  [0603]  119.38,101.09 180 top
R60  2.2k  [0603]  127,101.09 180 top
R61  1k  [0603]  9.4,118.75 0 top
R62  2.2k  [0603]  15.75,127 180 top
R63  2.2k  [0603]  23.37,127 180 top
R64  1k  [0603]  35.31,118.75 0 top
R65  2.2k  [0603]  41.66,127 180 top
R66  2.2k  [0603]  49.28,127 180 top
R67  1k  [0603]  61.21,118.75 0 top
R68  2.2k  [0603]  67.56,127 180 top
R69  2.2k  [0603]  75.18,127 180 top
R70  1k  [0603]  87.12,118.75 0 top
R71  2.2k  [0603]  93.47,127 180 top
R72  2.2k  [0603]  101.09,127 180 top
R73  1k  [0603]  113.03,118.75 0 top
R74  2.2k  [0603]  119.38,127 180 top
R75  2.2k  [0603]  127,127 180 top
U1  AHT20QFN-6  [QFN-6]  45.47,19.56 0 top
U2  AHT20QFN-6  [QFN-6]  19.56,19.56 0 top
U3  AHT20QFN-6  [QFN-6]  71.37,19.56 0 top
U4  AHT20QFN-6  [QFN-6]  97.28,19.56 0 top
U5  AHT20QFN-6  [QFN-6]  123.19,19.56 0 top
U6  AHT20QFN-6  [QFN-6]  19.56,45.47 0 top
U7  AHT20QFN-6  [QFN-6]  45.47,45.47 0 top
U8  AHT20QFN-6  [QFN-6]  71.37,45.47 0 top
U9  AHT20QFN-6  [QFN-6]  97.28,45.47 0 top
U10  AHT20QFN-6  [QFN-6]  123.19,45.47 0 top
U11  AHT20QFN-6  [QFN-6]  19.56,71.37 0 top
U12  AHT20QFN-6  [QFN-6]  45.47,71.37 0 top
U13  AHT20QFN-6  [QFN-6]  71.37,71.37 0 top
U14  AHT20QFN-6  [QFN-6]  97.28,71.37 0 top
U15  AHT20QFN-6  [QFN-6]  123.19,71.37 0 top
U16  AHT20QFN-6  [QFN-6]  19.56,97.28 0 top
U17  AHT20QFN-6  [QFN-6]  45.47,97.28 0 top
U18  AHT20QFN-6  [QFN-6]  71.37,97.28 0 top
U19  AHT20QFN-6  [QFN-6]  97.28,97.28 0 top
U20  AHT20QFN-6  [QFN-6]  123.19,97.28 0 top
U21  AHT20QFN-6  [QFN-6]  19.56,123.19 0 top
U22  AHT20QFN-6  [QFN-6]  45.47,123.19 0 top
U23  AHT20QFN-6  [QFN-6]  71.37,123.19 0 top
U24  AHT20QFN-6  [QFN-6]  97.28,123.19 0 top
U25  AHT20QFN-6  [QFN-6]  123.19,123.19 0 top
U$1  SPARKX-LOGO4  [SPARKX-MEDIUM]  19.56,30.35 0 top
U$2  SPARKX-LOGO4  [SPARKX-MEDIUM]  19.56,30.35 0 bottom
U$3  [GND1]  15.75,8.38 90 bottom
U$4  [3#3V2]  18.29,8.38 90 bottom
U$5  [SDA8]  20.83,8.38 90 bottom
U$6  [SCL9]  23.37,8.38 90 bottom
U$7  SPARKX-LOGO4  [SPARKX-MEDIUM]  45.47,30.35 0 bottom
U$8  [AHT20_HUMIDITY2]  26.16,28.07 0 bottom
U$9  [I_SUPER2_C-()-03]  20.95,26.54 0 bottom
U$10  [(PWR)]  6.86,12.19 0 top
U$11  [QWIIC_5.5MM]  29.21,14.99 0 top
U$12  [LED_32]  14.99,13.08 0 bottom
U$13  SPARKX-LOGO4  [SPARKX-MEDIUM]  45.47,30.35 0 top
U$14  [AHT20_HUMIDITY2]  12.83,28.07 0 top
U$15  [3#3V2]  44.2,8.38 90 top
U$16  [GND1]  41.66,8.38 90 top
U$17  [SCL9]  49.28,8.38 90 top
U$18  [SDA8]  46.74,8.38 90 top
U$19  [GND1]  41.66,8.38 90 bottom
U$20  [3#3V2]  44.2,8.38 90 bottom
U$21  [3#3V2]  18.29,8.38 90 top
U$22  [GND1]  15.75,8.38 90 top
U$23  [SDA8]  46.74,8.38 90 bottom
U$24  [SCL9]  49.28,8.38 90 bottom
U$25  [(PWR)]  32.77,12.19 0 top
U$26  [SCL9]  23.37,8.38 90 top
U$27  [SDA8]  20.83,8.38 90 top
U$28  [I_SUPER2_C-()-03]  46.86,26.54 0 bottom
U$29  [QWIIC_5.5MM]  55.12,14.99 0 top
U$30  [AHT20_HUMIDITY2]  38.73,28.07 0 top
U$31  [LED_32]  40.89,13.08 0 bottom
U$32  [AHT20_HUMIDITY2]  52.07,28.07 0 bottom
U$33  SPARKX-LOGO4  [SPARKX-MEDIUM]  71.37,30.35 0 bottom
U$34  SPARKX-LOGO4  [SPARKX-MEDIUM]  71.37,30.35 0 top
U$35  [3#3V2]  70.1,8.38 90 top
U$36  [GND1]  67.56,8.38 90 top
U$37  [SCL9]  75.18,8.38 90 top
U$38  [SDA8]  72.64,8.38 90 top
U$39  [GND1]  67.56,8.38 90 bottom
U$40  [3#3V2]  70.1,8.38 90 bottom
U$41  [SDA8]  72.64,8.38 90 bottom
U$42  [SCL9]  75.18,8.38 90 bottom
U$43  [(PWR)]  58.67,12.19 0 top
U$44  [I_SUPER2_C-()-03]  72.77,26.54 0 bottom
U$45  [QWIIC_5.5MM]  81.03,14.99 0 top
U$46  [AHT20_HUMIDITY2]  64.64,28.07 0 top
U$47  [LED_32]  66.8,13.08 0 bottom
U$48  [AHT20_HUMIDITY2]  77.98,28.07 0 bottom
U$49  SPARKX-LOGO4  [SPARKX-MEDIUM]  97.28,30.35 0 bottom
U$50  SPARKX-LOGO4  [SPARKX-MEDIUM]  97.28,30.35 0 top
U$51  [3#3V2]  96.01,8.38 90 top
U$52  [GND1]  93.47,8.38 90 top
U$53  [SCL9]  101.09,8.38 90 top
U$54  [SDA8]  98.55,8.38 90 top
U$55  [GND1]  93.47,8.38 90 bottom
U$56  [3#3V2]  96.01,8.38 90 bottom
U$57  [SDA8]  98.55,8.38 90 bottom
U$58  [SCL9]  101.09,8.38 90 bottom
U$59  [(PWR)]  84.58,12.19 0 top
U$60  [I_SUPER2_C-()-03]  98.68,26.54 0 bottom
U$61  [QWIIC_5.5MM]  106.93,14.99 0 top
U$62  [AHT20_HUMIDITY2]  90.55,28.07 0 top
U$63  [LED_32]  92.71,13.08 0 bottom
U$64  [AHT20_HUMIDITY2]  103.89,28.07 0 bottom
U$65  SPARKX-LOGO4  [SPARKX-MEDIUM]  123.19,30.35 0 bottom
U$66  SPARKX-LOGO4  [SPARKX-MEDIUM]  123.19,30.35 0 top
U$67  [3#3V2]  121.92,8.38 90 top
U$68  [GND1]  119.38,8.38 90 top
U$69  [SCL9]  127,8.38 90 top
U$70  [SDA8]  124.46,8.38 90 top
U$71  [GND1]  119.38,8.38 90 bottom
U$72  [3#3V2]  121.92,8.38 90 bottom
U$73  [SDA8]  124.46,8.38 90 bottom
U$74  [SCL9]  127,8.38 90 bottom
U$75  [(PWR)]  110.49,12.19 0 top
U$76  [I_SUPER2_C-()-03]  124.59,26.54 0 bottom
U$77  [QWIIC_5.5MM]  132.84,14.99 0 top
U$78  [AHT20_HUMIDITY2]  116.46,28.07 0 top
U$79  [LED_32]  118.62,13.08 0 bottom
U$80  [AHT20_HUMIDITY2]  129.79,28.07 0 bottom
U$81  SPARKX-LOGO4  [SPARKX-MEDIUM]  19.56,56.26 0 bottom
U$82  SPARKX-LOGO4  [SPARKX-MEDIUM]  19.56,56.26 0 top
U$83  [3#3V2]  18.29,34.29 90 top
U$84  [GND1]  15.75,34.29 90 top
U$85  [SCL9]  23.37,34.29 90 top
U$86  [SDA8]  20.83,34.29 90 top
U$87  [GND1]  15.75,34.29 90 bottom
U$88  [3#3V2]  18.29,34.29 90 bottom
U$89  [SDA8]  20.83,34.29 90 bottom
U$90  [SCL9]  23.37,34.29 90 bottom
U$91  [(PWR)]  6.86,38.1 0 top
U$92  [I_SUPER2_C-()-03]  20.95,52.45 0 bottom
U$93  [QWIIC_5.5MM]  29.21,40.89 0 top
U$94  [AHT20_HUMIDITY2]  12.83,53.97 0 top
U$95  [LED_32]  14.99,38.99 0 bottom
U$96  [AHT20_HUMIDITY2]  26.16,53.97 0 bottom
U$97  SPARKX-LOGO4  [SPARKX-MEDIUM]  45.47,56.26 0 bottom
U$98  SPARKX-LOGO4  [SPARKX-MEDIUM]  45.47,56.26 0 top
U$99  [3#3V2]  44.2,34.29 90 top
U$100  [GND1]  41.66,34.29 90 top
U$101  [SCL9]  49.28,34.29 90 top
U$102  [SDA8]  46.74,34.29 90 top
U$103  [GND1]  41.66,34.29 90 bottom
U$104  [3#3V2]  44.2,34.29 90 bottom
U$105  [SDA8]  46.74,34.29 90 bottom
U$106  [SCL9]  49.28,34.29 90 bottom
U$107  [(PWR)]  32.77,38.1 0 top
U$108  [I_SUPER2_C-()-03]  46.86,52.45 0 bottom
U$109  [QWIIC_5.5MM]  55.12,40.89 0 top
U$110  [AHT20_HUMIDITY2]  38.73,53.97 0 top
U$111  [LED_32]  40.89,38.99 0 bottom
U$112  [AHT20_HUMIDITY2]  52.07,53.97 0 bottom
U$113  SPARKX-LOGO4  [SPARKX-MEDIUM]  71.37,56.26 0 bottom
U$114  SPARKX-LOGO4  [SPARKX-MEDIUM]  71.37,56.26 0 top
U$115  [3#3V2]  70.1,34.29 90 top
U$116  [GND1]  67.56,34.29 90 top
U$117  [SCL9]  75.18,34.29 90 top
U$118  [SDA8]  72.64,34.29 90 top
U$119  [GND1]  67.56,34.29 90 bottom
U$120  [3#3V2]  70.1,34.29 90 bottom
U$121  [SDA8]  72.64,34.29 90 bottom
U$122  [SCL9]  75.18,34.29 90 bottom
U$123  [(PWR)]  58.67,38.1 0 top
U$124  [I_SUPER2_C-()-03]  72.77,52.45 0 bottom
U$125  [QWIIC_5.5MM]  81.03,40.89 0 top
U$126  [AHT20_HUMIDITY2]  64.64,53.97 0 top
U$127  [LED_32]  66.8,38.99 0 bottom
U$128  [AHT20_HUMIDITY2]  77.98,53.97 0 bottom
U$129  SPARKX-LOGO4  [SPARKX-MEDIUM]  97.28,56.26 0 bottom
U$130  SPARKX-LOGO4  [SPARKX-MEDIUM]  97.28,56.26 0 top
U$131  [3#3V2]  96.01,34.29 90 top
U$132  [GND1]  93.47,34.29 90 top
U$133  [SCL9]  101.09,34.29 90 top
U$134  [SDA8]  98.55,34.29 90 top
U$135  [GND1]  93.47,34.29 90 bottom
U$136  [3#3V2]  96.01,34.29 90 bottom
U$137  [SDA8]  98.55,34.29 90 bottom
U$138  [SCL9]  101.09,34.29 90 bottom
U$139  [(PWR)]  84.58,38.1 0 top
U$140  [I_SUPER2_C-()-03]  98.68,52.45 0 bottom
U$141  [QWIIC_5.5MM]  106.93,40.89 0 top
U$142  [AHT20_HUMIDITY2]  90.55,53.97 0 top
U$143  [LED_32]  92.71,38.99 0 bottom
U$144  [AHT20_HUMIDITY2]  103.89,53.97 0 bottom
U$145  SPARKX-LOGO4  [SPARKX-MEDIUM]  123.19,56.26 0 bottom
U$146  SPARKX-LOGO4  [SPARKX-MEDIUM]  123.19,56.26 0 top
U$147  [3#3V2]  121.92,34.29 90 top
U$148  [GND1]  119.38,34.29 90 top
U$149  [SCL9]  127,34.29 90 top
U$150  [SDA8]  124.46,34.29 90 top
U$151  [GND1]  119.38,34.29 90 bottom
U$152  [3#3V2]  121.92,34.29 90 bottom
U$153  [SDA8]  124.46,34.29 90 bottom
U$154  [SCL9]  127,34.29 90 bottom
U$155  [(PWR)]  110.49,38.1 0 top
U$156  [I_SUPER2_C-()-03]  124.59,52.45 0 bottom
U$157  [QWIIC_5.5MM]  132.84,40.89 0 top
U$158  [AHT20_HUMIDITY2]  116.46,53.97 0 top
U$159  [LED_32]  118.62,38.99 0 bottom
U$160  [AHT20_HUMIDITY2]  129.79,53.97 0 bottom
U$161  SPARKX-LOGO4  [SPARKX-MEDIUM]  19.56,82.17 0 bottom
U$162  SPARKX-LOGO4  [SPARKX-MEDIUM]  19.56,82.17 0 top
U$163  [3#3V2]  18.29,60.2 90 top
U$164  [GND1]  15.75,60.2 90 top
U$165  [SCL9]  23.37,60.2 90 top
U$166  [SDA8]  20.83,60.2 90 top
U$167  [GND1]  15.75,60.2 90 bottom
U$168  [3#3V2]  18.29,60.2 90 bottom
U$169  [SDA8]  20.83,60.2 90 bottom
U$170  [SCL9]  23.37,60.2 90 bottom
U$171  [(PWR)]  6.86,64.01 0 top
U$172  [I_SUPER2_C-()-03]  20.95,78.36 0 bottom
U$173  [QWIIC_5.5MM]  29.21,66.8 0 top
U$174  [AHT20_HUMIDITY2]  12.83,79.88 0 top
U$175  [LED_32]  14.99,64.9 0 bottom
U$176  [AHT20_HUMIDITY2]  26.16,79.88 0 bottom
U$177  SPARKX-LOGO4  [SPARKX-MEDIUM]  45.47,82.17 0 bottom
U$178  SPARKX-LOGO4  [SPARKX-MEDIUM]  45.47,82.17 0 top
U$179  [3#3V2]  44.2,60.2 90 top
U$180  [GND1]  41.66,60.2 90 top
U$181  [SCL9]  49.28,60.2 90 top
U$182  [SDA8]  46.74,60.2 90 top
U$183  [GND1]  41.66,60.2 90 bottom
U$184  [3#3V2]  44.2,60.2 90 bottom
U$185  [SDA8]  46.74,60.2 90 bottom
U$186  [SCL9]  49.28,60.2 90 bottom
U$187  [(PWR)]  32.77,64.01 0 top
U$188  [I_SUPER2_C-()-03]  46.86,78.36 0 bottom
U$189  [QWIIC_5.5MM]  55.12,66.8 0 top
U$190  [AHT20_HUMIDITY2]  38.73,79.88 0 top
U$191  [LED_32]  40.89,64.9 0 bottom
U$192  [AHT20_HUMIDITY2]  52.07,79.88 0 bottom
U$193  SPARKX-LOGO4  [SPARKX-MEDIUM]  71.37,82.17 0 bottom
U$194  SPARKX-LOGO4  [SPARKX-MEDIUM]  71.37,82.17 0 top
U$195  [3#3V2]  70.1,60.2 90 top
U$196  [GND1]  67.56,60.2 90 top
U$197  [SCL9]  75.18,60.2 90 top
U$198  [SDA8]  72.64,60.2 90 top
U$199  [GND1]  67.56,60.2 90 bottom
U$200  [3#3V2]  70.1,60.2 90 bottom
U$201  [SDA8]  72.64,60.2 90 bottom
U$202  [SCL9]  75.18,60.2 90 bottom
U$203  [(PWR)]  58.67,64.01 0 top
U$204  [I_SUPER2_C-()-03]  72.77,78.36 0 bottom
U$205  [QWIIC_5.5MM]  81.03,66.8 0 top
U$206  [AHT20_HUMIDITY2]  64.64,79.88 0 top
U$207  [LED_32]  66.8,64.9 0 bottom
U$208  [AHT20_HUMIDITY2]  77.98,79.88 0 bottom
U$209  SPARKX-LOGO4  [SPARKX-MEDIUM]  97.28,82.17 0 bottom
U$210  SPARKX-LOGO4  [SPARKX-MEDIUM]  97.28,82.17 0 top
U$211  [3#3V2]  96.01,60.2 90 top
U$212  [GND1]  93.47,60.2 90 top
U$213  [SCL9]  101.09,60.2 90 top
U$214  [SDA8]  98.55,60.2 90 top
U$215  [GND1]  93.47,60.2 90 bottom
U$216  [3#3V2]  96.01,60.2 90 bottom
U$217  [SDA8]  98.55,60.2 90 bottom
U$218  [SCL9]  101.09,60.2 90 bottom
U$219  [(PWR)]  84.58,64.01 0 top
U$220  [I_SUPER2_C-()-03]  98.68,78.36 0 bottom
U$221  [QWIIC_5.5MM]  106.93,66.8 0 top
U$222  [AHT20_HUMIDITY2]  90.55,79.88 0 top
U$223  [LED_32]  92.71,64.9 0 bottom
U$224  [AHT20_HUMIDITY2]  103.89,79.88 0 bottom
U$225  SPARKX-LOGO4  [SPARKX-MEDIUM]  123.19,82.17 0 bottom
U$226  SPARKX-LOGO4  [SPARKX-MEDIUM]  123.19,82.17 0 top
U$227  [3#3V2]  121.92,60.2 90 top
U$228  [GND1]  119.38,60.2 90 top
U$229  [SCL9]  127,60.2 90 top
U$230  [SDA8]  124.46,60.2 90 top
U$231  [GND1]  119.38,60.2 90 bottom
U$232  [3#3V2]  121.92,60.2 90 bottom
U$233  [SDA8]  124.46,60.2 90 bottom
U$234  [SCL9]  127,60.2 90 bottom
U$235  [(PWR)]  110.49,64.01 0 top
U$236  [I_SUPER2_C-()-03]  124.59,78.36 0 bottom
U$237  [QWIIC_5.5MM]  132.84,66.8 0 top
U$238  [AHT20_HUMIDITY2]  116.46,79.88 0 top
U$239  [LED_32]  118.62,64.9 0 bottom
U$240  [AHT20_HUMIDITY2]  129.79,79.88 0 bottom
U$241  SPARKX-LOGO4  [SPARKX-MEDIUM]  19.56,108.08 0 bottom
U$242  SPARKX-LOGO4  [SPARKX-MEDIUM]  19.56,108.08 0 top
U$243  [3#3V2]  18.29,86.11 90 top
U$244  [GND1]  15.75,86.11 90 top
U$245  [SCL9]  23.37,86.11 90 top
U$246  [SDA8]  20.83,86.11 90 top
U$247  [GND1]  15.75,86.11 90 bottom
U$248  [3#3V2]  18.29,86.11 90 bottom
U$249  [SDA8]  20.83,86.11 90 bottom
U$250  [SCL9]  23.37,86.11 90 bottom
U$251  [(PWR)]  6.86,89.92 0 top
U$252  [I_SUPER2_C-()-03]  20.95,104.27 0 bottom
U$253  [QWIIC_5.5MM]  29.21,92.71 0 top
U$254  [AHT20_HUMIDITY2]  12.83,105.79 0 top
U$255  [LED_32]  14.99,90.81 0 bottom
U$256  [AHT20_HUMIDITY2]  26.16,105.79 0 bottom
U$257  SPARKX-LOGO4  [SPARKX-MEDIUM]  45.47,108.08 0 bottom
U$258  SPARKX-LOGO4  [SPARKX-MEDIUM]  45.47,108.08 0 top
U$259  [3#3V2]  44.2,86.11 90 top
U$260  [GND1]  41.66,86.11 90 top
U$261  [SCL9]  49.28,86.11 90 top
U$262  [SDA8]  46.74,86.11 90 top
U$263  [GND1]  41.66,86.11 90 bottom
U$264  [3#3V2]  44.2,86.11 90 bottom
U$265  [SDA8]  46.74,86.11 90 bottom
U$266  [SCL9]  49.28,86.11 90 bottom
U$267  [(PWR)]  32.77,89.92 0 top
U$268  [I_SUPER2_C-()-03]  46.86,104.27 0 bottom
U$269  [QWIIC_5.5MM]  55.12,92.71 0 top
U$270  [AHT20_HUMIDITY2]  38.73,105.79 0 top
U$271  [LED_32]  40.89,90.81 0 bottom
U$272  [AHT20_HUMIDITY2]  52.07,105.79 0 bottom
U$273  SPARKX-LOGO4  [SPARKX-MEDIUM]  71.37,108.08 0 bottom
U$274  SPARKX-LOGO4  [SPARKX-MEDIUM]  71.37,108.08 0 top
U$275  [3#3V2]  70.1,86.11 90 top
U$276  [GND1]  67.56,86.11 90 top
U$277  [SCL9]  75.18,86.11 90 top
U$278  [SDA8]  72.64,86.11 90 top
U$279  [GND1]  67.56,86.11 90 bottom
U$280  [3#3V2]  70.1,86.11 90 bottom
U$281  [SDA8]  72.64,86.11 90 bottom
U$282  [SCL9]  75.18,86.11 90 bottom
U$283  [(PWR)]  58.67,89.92 0 top
U$284  [I_SUPER2_C-()-03]  72.77,104.27 0 bottom
U$285  [QWIIC_5.5MM]  81.03,92.71 0 top
U$286  [AHT20_HUMIDITY2]  64.64,105.79 0 top
U$287  [LED_32]  66.8,90.81 0 bottom
U$288  [AHT20_HUMIDITY2]  77.98,105.79 0 bottom
U$289  SPARKX-LOGO4  [SPARKX-MEDIUM]  97.28,108.08 0 bottom
U$290  SPARKX-LOGO4  [SPARKX-MEDIUM]  97.28,108.08 0 top
U$291  [3#3V2]  96.01,86.11 90 top
U$292  [GND1]  93.47,86.11 90 top
U$293  [SCL9]  101.09,86.11 90 top
U$294  [SDA8]  98.55,86.11 90 top
U$295  [GND1]  93.47,86.11 90 bottom
U$296  [3#3V2]  96.01,86.11 90 bottom
U$297  [SDA8]  98.55,86.11 90 bottom
U$298  [SCL9]  101.09,86.11 90 bottom
U$299  [(PWR)]  84.58,89.92 0 top
U$300  [I_SUPER2_C-()-03]  98.68,104.27 0 bottom
U$301  [QWIIC_5.5MM]  106.93,92.71 0 top
U$302  [AHT20_HUMIDITY2]  90.55,105.79 0 top
U$303  [LED_32]  92.71,90.81 0 bottom
U$304  [AHT20_HUMIDITY2]  103.89,105.79 0 bottom
U$305  SPARKX-LOGO4  [SPARKX-MEDIUM]  123.19,108.08 0 bottom
U$306  SPARKX-LOGO4  [SPARKX-MEDIUM]  123.19,108.08 0 top
U$307  [3#3V2]  121.92,86.11 90 top
U$308  [GND1]  119.38,86.11 90 top
U$309  [SCL9]  127,86.11 90 top
U$310  [SDA8]  124.46,86.11 90 top
U$311  [GND1]  119.38,86.11 90 bottom
U$312  [3#3V2]  121.92,86.11 90 bottom
U$313  [SDA8]  124.46,86.11 90 bottom
U$314  [SCL9]  127,86.11 90 bottom
U$315  [(PWR)]  110.49,89.92 0 top
U$316  [I_SUPER2_C-()-03]  124.59,104.27 0 bottom
U$317  [QWIIC_5.5MM]  132.84,92.71 0 top
U$318  [AHT20_HUMIDITY2]  116.46,105.79 0 top
U$319  [LED_32]  118.62,90.81 0 bottom
U$320  [AHT20_HUMIDITY2]  129.79,105.79 0 bottom
U$321  SPARKX-LOGO4  [SPARKX-MEDIUM]  19.56,133.98 0 bottom
U$322  SPARKX-LOGO4  [SPARKX-MEDIUM]  19.56,133.98 0 top
U$323  [3#3V2]  18.29,112.01 90 top
U$324  [GND1]  15.75,112.01 90 top
U$325  [SCL9]  23.37,112.01 90 top
U$326  [SDA8]  20.83,112.01 90 top
U$327  [GND1]  15.75,112.01 90 bottom
U$328  [3#3V2]  18.29,112.01 90 bottom
U$329  [SDA8]  20.83,112.01 90 bottom
U$330  [SCL9]  23.37,112.01 90 bottom
U$331  [(PWR)]  6.86,115.82 0 top
U$332  [I_SUPER2_C-()-03]  20.95,130.17 0 bottom
U$333  [QWIIC_5.5MM]  29.21,118.62 0 top
U$334  [AHT20_HUMIDITY2]  12.83,131.7 0 top
U$335  [LED_32]  14.99,116.71 0 bottom
U$336  [AHT20_HUMIDITY2]  26.16,131.7 0 bottom
U$337  SPARKX-LOGO4  [SPARKX-MEDIUM]  45.47,133.98 0 bottom
U$338  SPARKX-LOGO4  [SPARKX-MEDIUM]  45.47,133.98 0 top
U$339  [3#3V2]  44.2,112.01 90 top
U$340  [GND1]  41.66,112.01 90 top
U$341  [SCL9]  49.28,112.01 90 top
U$342  [SDA8]  46.74,112.01 90 top
U$343  [GND1]  41.66,112.01 90 bottom
U$344  [3#3V2]  44.2,112.01 90 bottom
U$345  [SDA8]  46.74,112.01 90 bottom
U$346  [SCL9]  49.28,112.01 90 bottom
U$347  [(PWR)]  32.77,115.82 0 top
U$348  [I_SUPER2_C-()-03]  46.86,130.17 0 bottom
U$349  [QWIIC_5.5MM]  55.12,118.62 0 top
U$350  [AHT20_HUMIDITY2]  38.73,131.7 0 top
U$351  [LED_32]  40.89,116.71 0 bottom
U$352  [AHT20_HUMIDITY2]  52.07,131.7 0 bottom
U$353  SPARKX-LOGO4  [SPARKX-MEDIUM]  71.37,133.98 0 bottom
U$354  SPARKX-LOGO4  [SPARKX-MEDIUM]  71.37,133.98 0 top
U$355  [3#3V2]  70.1,112.01 90 top
U$356  [GND1]  67.56,112.01 90 top
U$357  [SCL9]  75.18,112.01 90 top
U$358  [SDA8]  72.64,112.01 90 top
U$359  [GND1]  67.56,112.01 90 bottom
U$360  [3#3V2]  70.1,112.01 90 bottom
U$361  [SDA8]  72.64,112.01 90 bottom
U$362  [SCL9]  75.18,112.01 90 bottom
U$363  [(PWR)]  58.67,115.82 0 top
U$364  [I_SUPER2_C-()-03]  72.77,130.17 0 bottom
U$365  [QWIIC_5.5MM]  81.03,118.62 0 top
U$366  [AHT20_HUMIDITY2]  64.64,131.7 0 top
U$367  [LED_32]  66.8,116.71 0 bottom
U$368  [AHT20_HUMIDITY2]  77.98,131.7 0 bottom
U$369  SPARKX-LOGO4  [SPARKX-MEDIUM]  97.28,133.98 0 bottom
U$370  SPARKX-LOGO4  [SPARKX-MEDIUM]  97.28,133.98 0 top
U$371  [3#3V2]  96.01,112.01 90 top
U$372  [GND1]  93.47,112.01 90 top
U$373  [SCL9]  101.09,112.01 90 top
U$374  [SDA8]  98.55,112.01 90 top
U$375  [GND1]  93.47,112.01 90 bottom
U$376  [3#3V2]  96.01,112.01 90 bottom
U$377  [SDA8]  98.55,112.01 90 bottom
U$378  [SCL9]  101.09,112.01 90 bottom
U$379  [(PWR)]  84.58,115.82 0 top
U$380  [I_SUPER2_C-()-03]  98.68,130.17 0 bottom
U$381  [QWIIC_5.5MM]  106.93,118.62 0 top
U$382  [AHT20_HUMIDITY2]  90.55,131.7 0 top
U$383  [LED_32]  92.71,116.71 0 bottom
U$384  [AHT20_HUMIDITY2]  103.89,131.7 0 bottom
U$385  SPARKX-LOGO4  [SPARKX-MEDIUM]  123.19,133.98 0 bottom
U$386  SPARKX-LOGO4  [SPARKX-MEDIUM]  123.19,133.98 0 top
U$387  [3#3V2]  121.92,112.01 90 top
U$388  [GND1]  119.38,112.01 90 top
U$389  [SCL9]  127,112.01 90 top
U$390  [SDA8]  124.46,112.01 90 top
U$391  [GND1]  119.38,112.01 90 bottom
U$392  [3#3V2]  121.92,112.01 90 bottom
U$393  [SDA8]  124.46,112.01 90 bottom
U$394  [SCL9]  127,112.01 90 bottom
U$395  [(PWR)]  110.49,115.82 0 top
U$396  [I_SUPER2_C-()-03]  124.59,130.17 0 bottom
U$397  [QWIIC_5.5MM]  132.84,118.62 0 top
U$398  [AHT20_HUMIDITY2]  116.46,131.7 0 top
U$399  [LED_32]  118.62,116.71 0 bottom
U$400  [AHT20_HUMIDITY2]  129.79,131.7 0 bottom

## Library data of the parts
C1-C25 = SparkFun-Capacitors; PROD_ID: CAP-00810
D1-D25 = SparkFun-LED; PROD_ID: DIO-00819
E$1-E$4 JP1 JP2 JP5 JP6 JP12-JP15 JP21-JP24 JP30-JP33 JP39-JP42 JP48-JP51 JP57-JP60 JP66-JP69 JP75-JP78 JP84-JP87 JP93-JP96 JP102-JP105 JP111-JP114 JP120-JP123 JP129-JP132 JP138-JP141 JP147-JP150 JP156-JP159 JP165-JP168 JP174-JP177 JP183-JP186 JP192-JP195 JP201-JP204 JP210-JP213 JP219-JP222 LOGO1-LOGO25 U$11 U$29 U$45 U$61 U$77 U$93 U$109 U$125 U$141 U$157 U$173 U$189 U$205 U$221 U$237 U$253 U$269 U$285 U$301 U$317 U$333 U$349 U$365 U$381 U$397 = SparkFun-Aesthetics
E$5 E$6 = SparkFun-Retired
J1 J2 J4 J6 J7 J9 J10 J12 J13 J15 J16 J18 J19 J21 J22 J24 J25 J27 J28 J30 J31 J33 J34 J36 J37 J39 J40 J42 J43 J45 J46 J48 J49 J51 J52 J54 J55 J57 J58 J60 J61 J63 J64 J66 J67 J69 J70 J72 J73 J75 = SparkFun-Connectors; PROD_ID: CONN-13694
J3 J5 J8 J11 J14 J17 J20 J23 J26 J29 J32 J35 J38 J41 J44 J47 J50 J53 J56 J59 J62 J65 J68 J71 J74 U$1 U$2 U$7 U$13 U$33 U$34 U$49 U$50 U$65 U$66 U$81 U$82 U$97 U$98 U$113 U$114 U$129 U$130 U$145 U$146 U$161 U$162 U$177 U$178 U$193 U$194 U$209 U$210 U$225 U$226 U$241 U$242 U$257 U$258 U$273 U$274 U$289 U$290 U$305 U$306 U$321 U$322 U$337 U$338 U$353 U$354 U$369 U$370 U$385 U$386 = SparkX
JP3 JP4 JP8-JP11 JP17-JP20 JP26-JP29 JP35-JP38 JP44-JP47 JP53-JP56 JP62-JP65 JP71-JP74 JP80-JP83 JP89-JP92 JP98-JP101 JP107-JP110 JP116-JP119 JP125-JP128 JP134-JP137 JP143-JP146 JP152-JP155 JP161-JP164 JP170-JP173 JP179-JP182 JP188-JP191 JP197-JP200 JP206-JP209 JP215-JP218 JP224 JP225 = SparkFun-Hardware
JP7 JP16 JP25 JP34 JP43 JP52 JP61 JP70 JP79 JP88 JP97 JP106 JP115 JP124 JP133 JP142 JP151 JP160 JP169 JP178 JP187 JP196 JP205 JP214 JP223 LED LED1-LED24 = SparkFun-Jumpers
R1 R2 R5 R6 R8 R9 R11 R12 R14 R15 R17 R18 R20 R21 R23 R24 R26 R27 R29 R30 R32 R33 R35 R36 R38 R39 R41 R42 R44 R45 R47 R48 R50 R51 R53 R54 R56 R57 R59 R60 R62 R63 R65 R66 R68 R69 R71 R72 R74 R75 = SparkFun-Resistors; PROD_ID: RES-08272
R3 R4 R7 R10 R13 R16 R19 R22 R25 R28 R31 R34 R37 R40 R43 R46 R49 R52 R55 R58 R61 R64 R67 R70 R73 = SparkFun-Resistors; PROD_ID: RES-07856
U1-U25 = AHT20; PROD_ID: IC-
U$3-U$6 U$10 U$15-U$27 U$35-U$43 U$51-U$59 U$67-U$75 U$83-U$91 U$99-U$107 U$115-U$123 U$131-U$139 U$147-U$155 U$163-U$171 U$179-U$187 U$195-U$203 U$211-U$219 U$227-U$235 U$243-U$251 U$259-U$267 U$275-U$283 U$291-U$299 U$307-U$315 U$323-U$331 U$339-U$347 U$355-U$363 U$371-U$379 U$387-U$395 = Labels-0_04
U$8 U$14 U$30 U$32 U$46 U$48 U$62 U$64 U$78 U$80 U$94 U$96 U$110 U$112 U$126 U$128 U$142 U$144 U$158 U$160 U$174 U$176 U$190 U$192 U$206 U$208 U$222 U$224 U$238 U$240 U$254 U$256 U$270 U$272 U$286 U$288 U$302 U$304 U$318 U$320 U$334 U$336 U$350 U$352 U$366 U$368 U$382 U$384 U$398 U$400 = buzzard_labels (17)
U$9 U$28 U$44 U$60 U$76 U$92 U$108 U$124 U$140 U$156 U$172 U$188 U$204 U$220 U$236 U$252 U$268 U$284 U$300 U$316 U$332 U$348 U$364 U$380 U$396 = Labels
U$12 U$31 U$47 U$63 U$79 U$95 U$111 U$127 U$143 U$159 U$175 U$191 U$207 U$223 U$239 U$255 U$271 U$287 U$303 U$319 U$335 U$351 U$367 U$383 U$399 = SparkFun-Buzzard